# Altium PCB PCB.PcbDoc
Units mil, origin at the board's own origin, x right, y up, seen from the top; angles counter-clockwise.
Board outline 4527.56 x 4330.71 mil, 2 copper layers (Top Layer, Bottom Layer); 52 components, 53 nets, 229 pads, 4 vias.
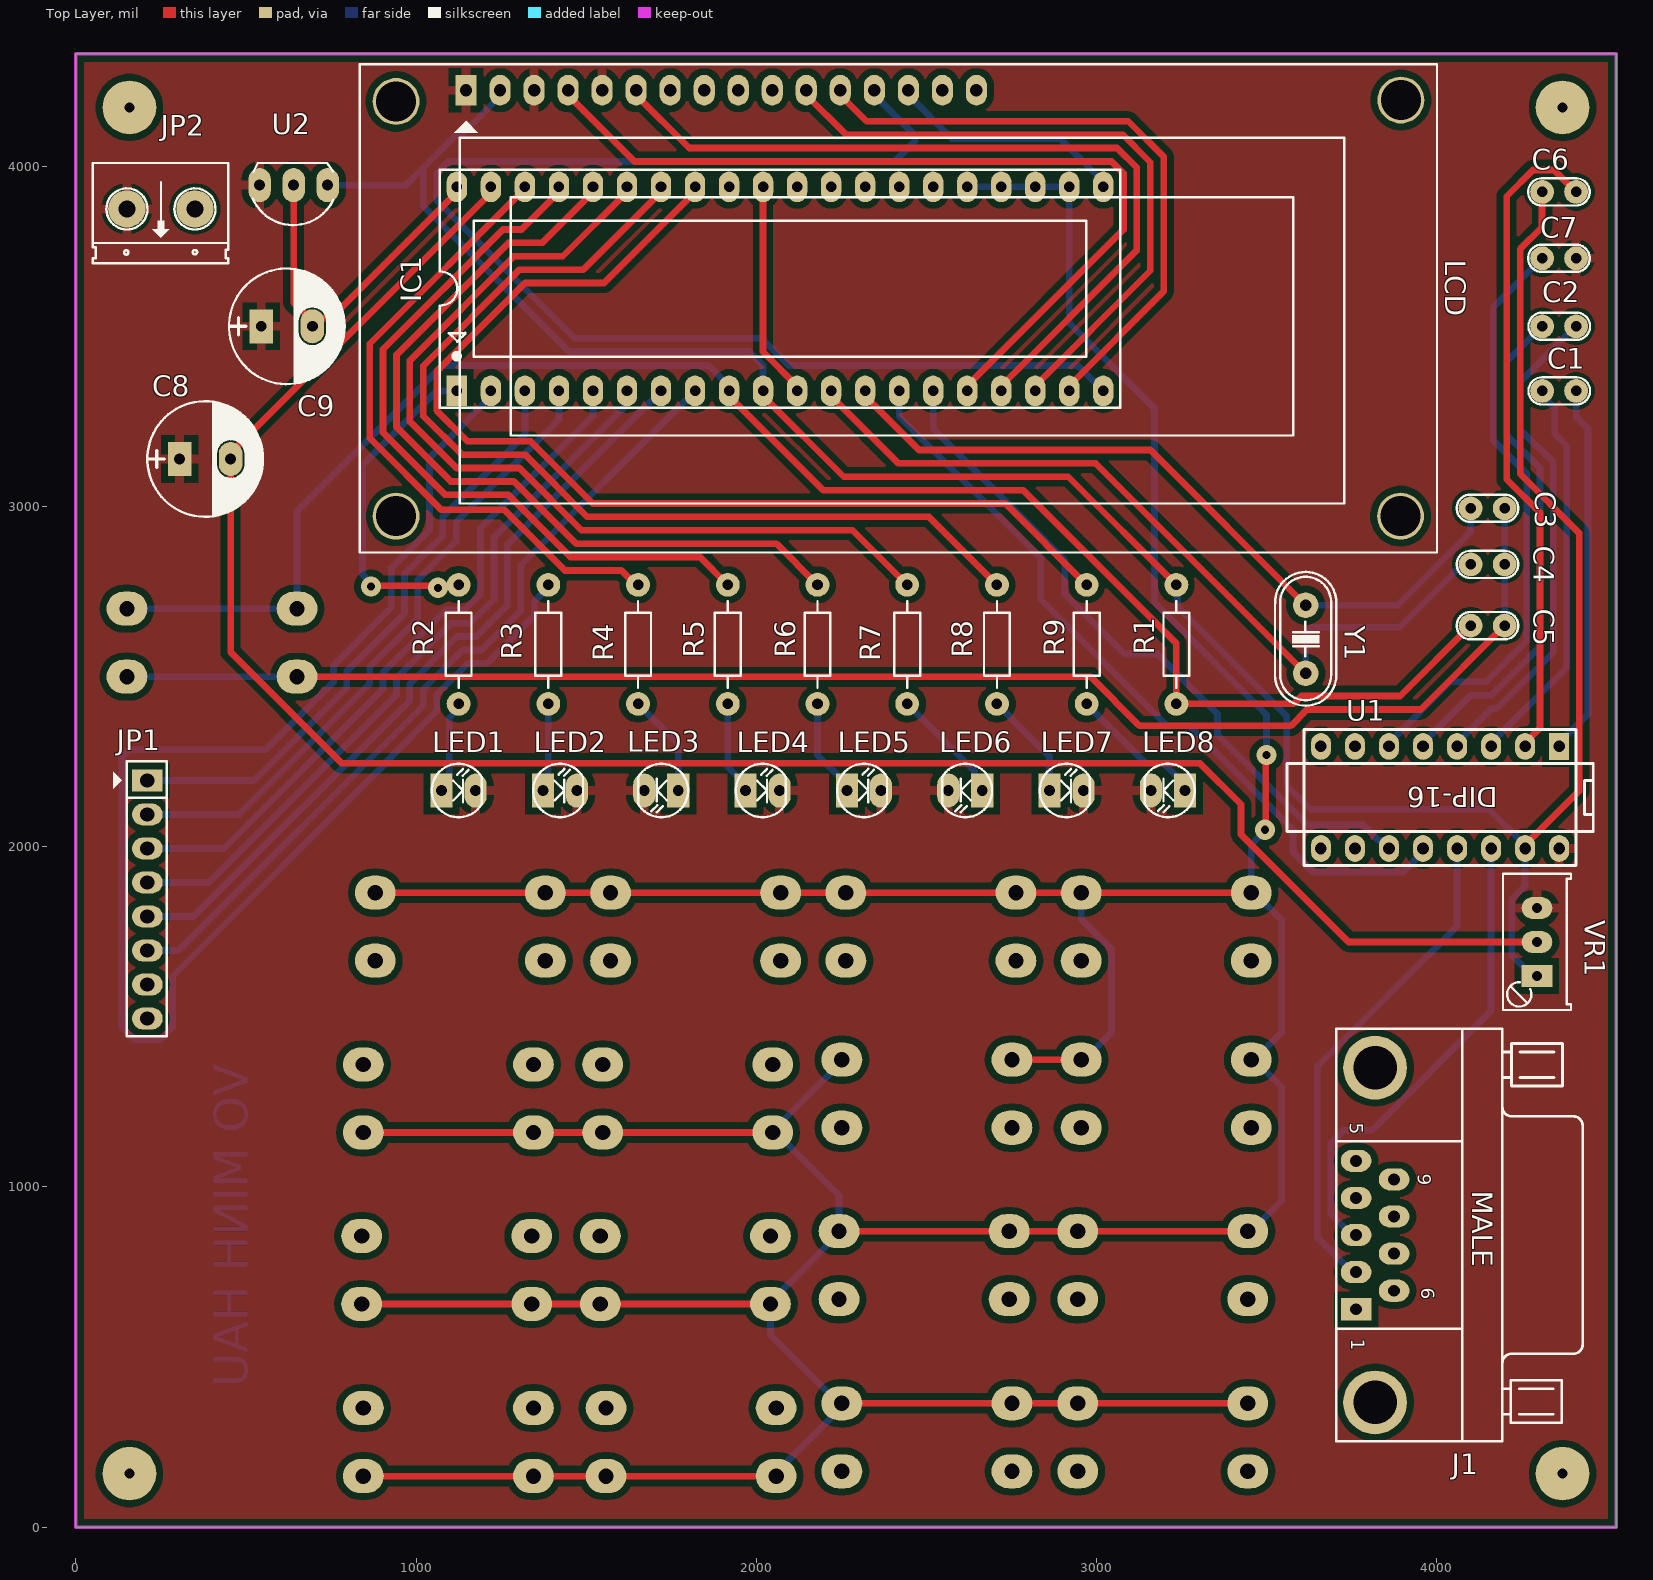
[diagram p0: Top Layer view]
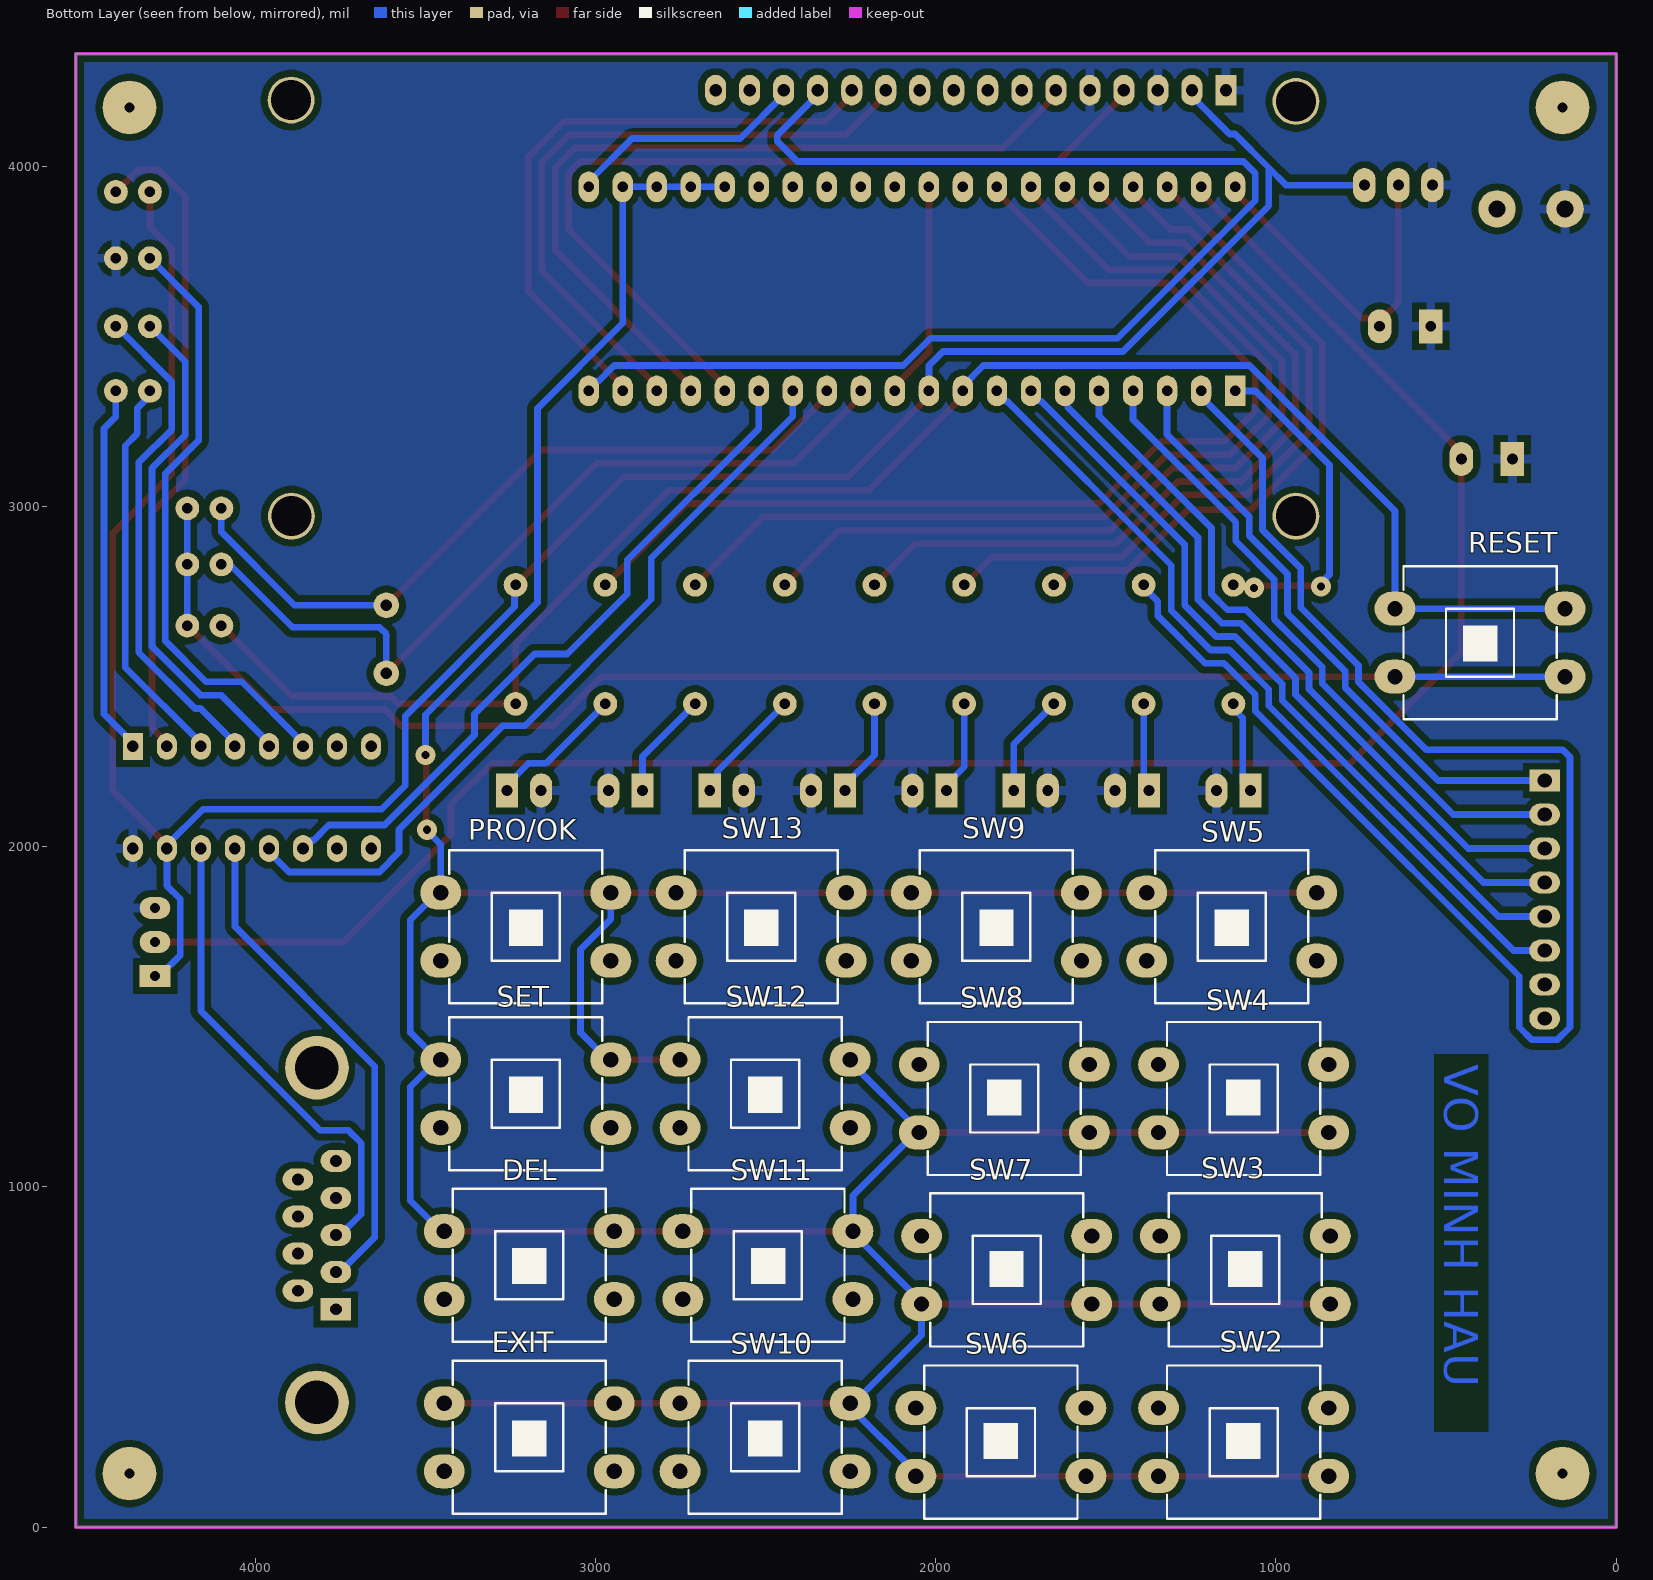
[diagram p1: Bottom Layer view, seen from below]
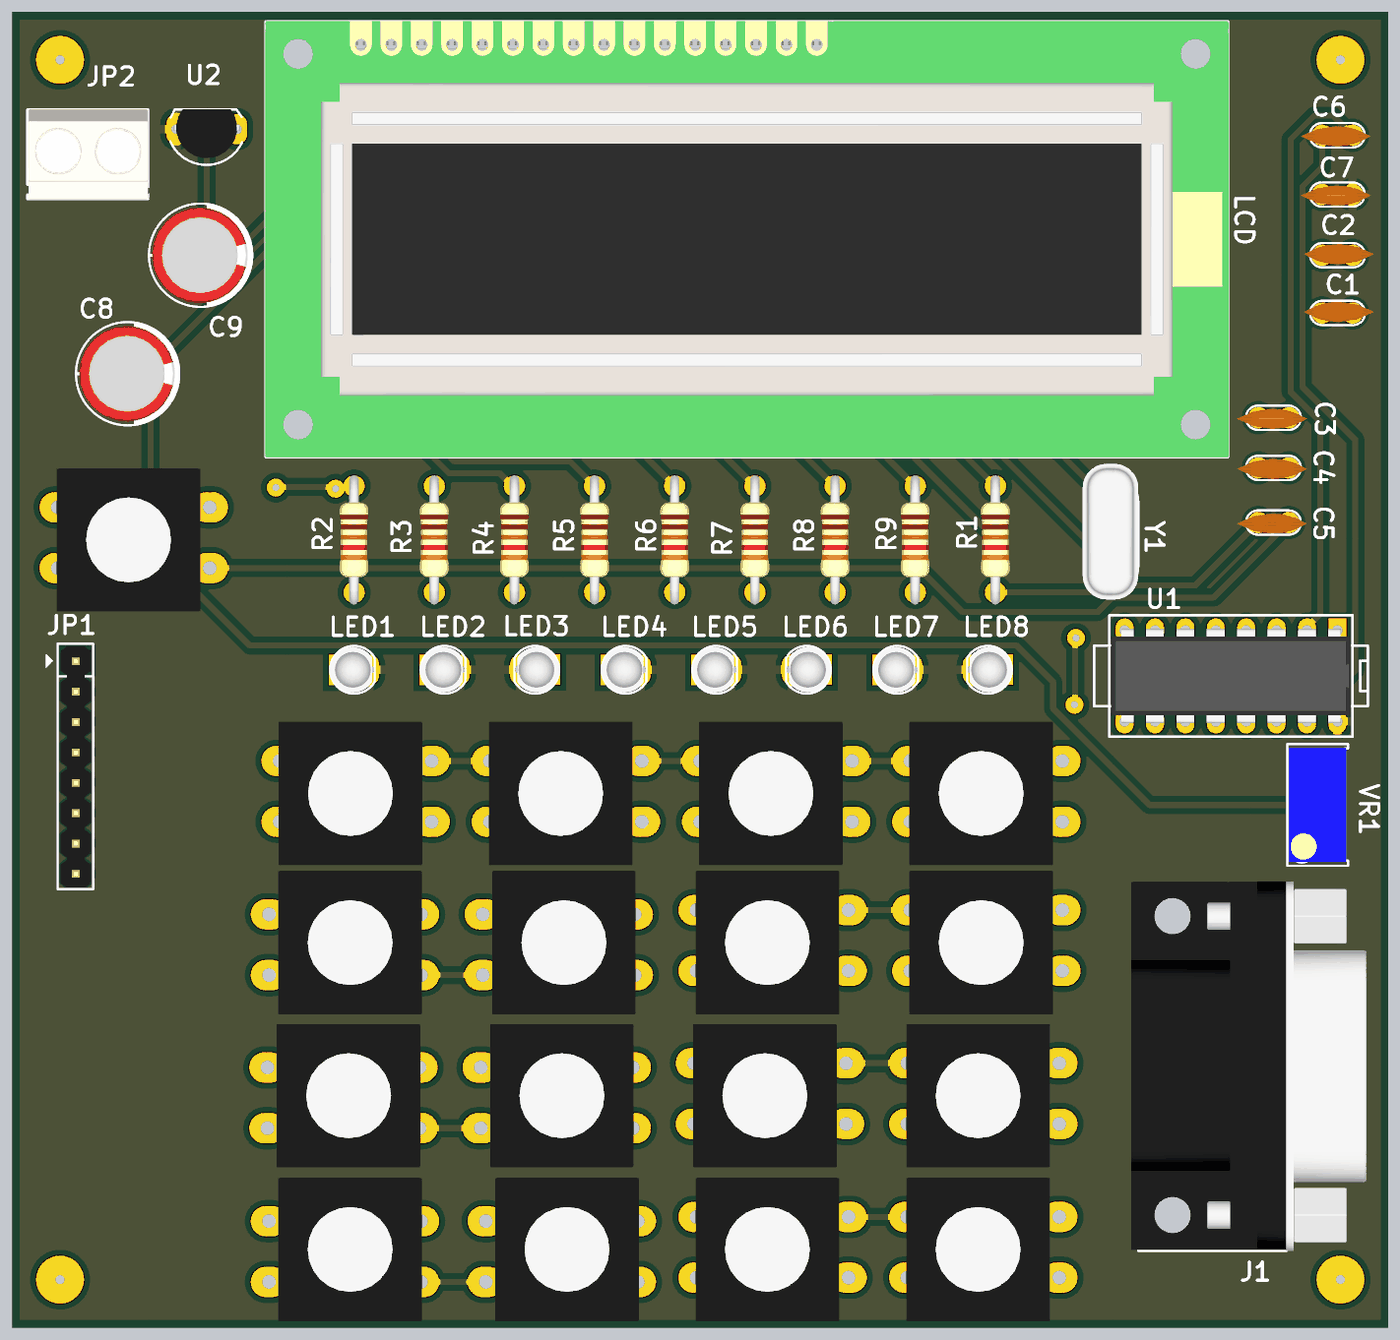
[diagram p2: 3D render of the assembled board from above, using the file's embedded part models]
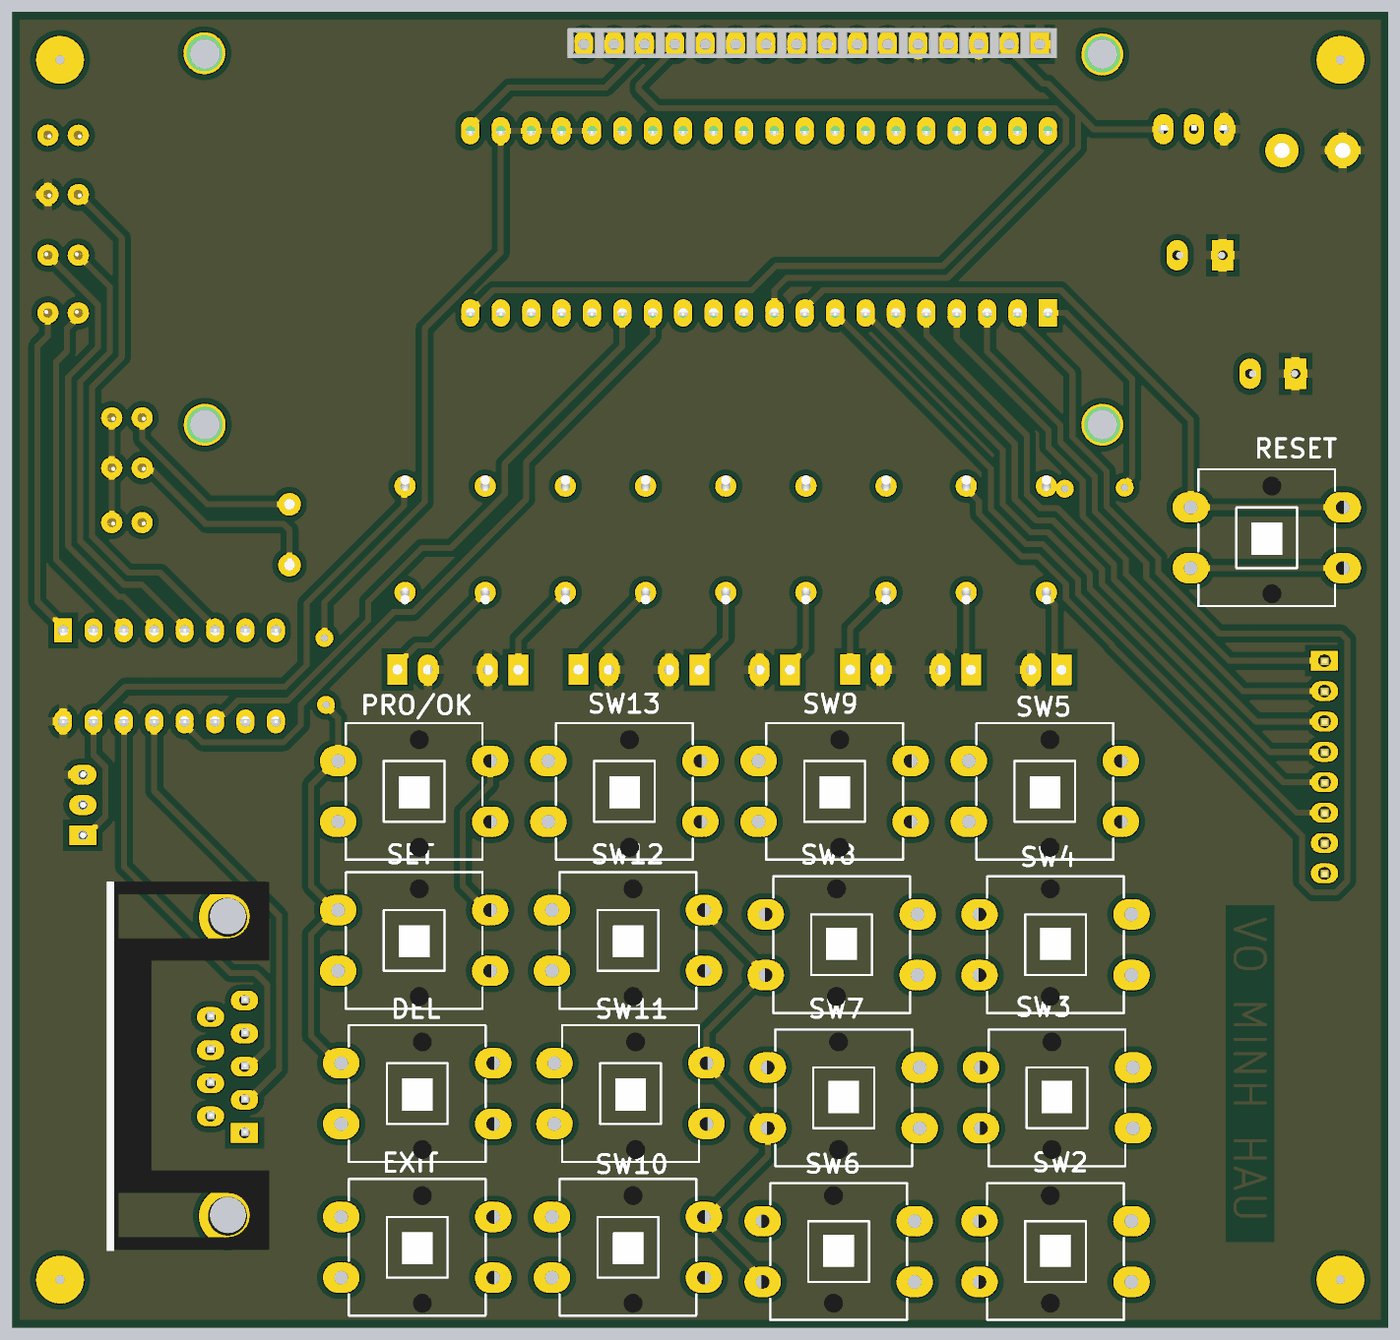
[diagram p3: 3D render of the assembled board from below, using the file's embedded part models]

## Layer stack, top to bottom
Top Solder: solder mask 0.4, Solder Resist, Dk 3.5
Top Layer: signal copper 1.4
Dielectric 1: dielectric 12.6, FR-4, Dk 4.8
Bottom Layer: signal copper 1.4
Bottom Solder: solder mask 0.4, Solder Resist, Dk 3.5

## Board outline
0,0 0,4330.71 4527.56,4330.71 4527.56,0

## Design rules (kind name [scope] priority, off if disabled: settings)
Clearance [All] p1: gap=19.68 ignorepadtopadclearanceinfootprint=FALSE
PolygonConnect [All] p1: connectstyle=Relief reliefconductorwidth=27.56 reliefentries=4 polygonreliefangle="90 Angle" airgapwidth=19.68
RoutingVias [All] p1: holewidth=23.62 width=59.06 viastyle="Through Hole" minholewidth=23.62 minwidth=59.06 maxholewidth=23.62 maxwidth=59.06
SolderMaskExpansion [All] p1: expansion=4 istentingtop=FALSE
Width [All] p1: maxlimit=39.37 minlimit=19.68 preferedwidth=27.56
30 further rules are at their usual default settings.

## Components (designator, comment, footprint, x,y, rotation, side; value= is the part's Value field where it differs from the comment)
C1 "100n" CN1 4310,3340 r0 top value=100pF
C2 "100n" CN1 4310,3530 r0 top value=100pF
C3 "27p" CN1 4200,2995 r180 top value=100pF
C4 "27p" CN1 4200,2830 r180 top value=100pF
C5 "0.1M" CN1 4200,2650 r180 top value=100pF
C6 "100n" CN1 4410,3925 r180 top value=100pF
C7 "100n" CN1 4410,3730 r180 top value=100pF
C8 "10M" CP1.5/3.4 305,3140 r0 top value=1000uF/16V
C9 "1M" CP1.5/3.4 545,3530 r0 top value=1000uF/16V
DEL "SW" SW4B 2945,870 r0 bottom value="Button chip 4 pin"
EXIT "SW" SW4B 2945,364.01 r0 bottom value="Button chip 4 pin"
IC1 "ATMEL 16L" DIP40/W0.6 2095,3640 r0 top value="Atmega 16L"
J1 "COM 9 MALE" "DSB 9-M" 3819.09,858.58 r90 top value="COM 9"
JP1 "JP8 PIN" JP8 210,2195 r270 top value=JP7
JP2 "Header2" Header2 350,3875 r180 top
LCD "LCD16x2" LCD16X2 1147,4224 r0 top
LED1 "LED" LED-3 1075,2165 r0 top value="LED 3 ly Single Colour"
LED2 "LED" LED-3 1372.86,2165 r0 top value="LED 3 ly Single Colour"
LED3 "LED" LED-3 1770.71,2165.7 r180 top value="LED 3 ly Single Colour"
LED4 "LED" LED-3 1968.57,2165 r0 top value="LED 3 ly Single Colour"
LED5 "LED" LED-3 2266.43,2165 r0 top value="LED 3 ly Single Colour"
LED6 "LED" LED-3 2664.29,2165.7 r180 top value="LED 3 ly Single Colour"
LED7 "LED" LED-3 2862.14,2165 r0 top value="LED 3 ly Single Colour"
LED8 "LED" LED-3 3260,2165.7 r180 top value="LED 3 ly Single Colour"
PRO/OK "SW" SW4B 2955,1865 r0 bottom value="Button chip 4 pin"
R1 "10k" R1/4W 3235,2420 r90 top value="R1/4W - 1K"
R2 "330" R1/4W 1125,2420 r90 top value="R1/4W - 1K"
R3 "330" R1/4W 1388.75,2420 r90 top value="R1/4W - 1K"
R4 "330" R1/4W 1652.5,2420 r90 top value="R1/4W - 1K"
R5 "330" R1/4W 1916.25,2420 r90 top value="R1/4W - 1K"
R6 "330" R1/4W 2180,2420 r90 top value="R1/4W - 1K"
R7 "330" R1/4W 2443.75,2420 r90 top value="R1/4W - 1K"
R8 "330" R1/4W 2707.5,2420 r90 top value="R1/4W - 1K"
R9 "330" R1/4W 2971.25,2420 r90 top value="R1/4W - 1K"
RESET "SW" SW4B 150,2700 r0 bottom value="Button chip 4 pin"
SET "SW" SW4B 2955,1374.01 r0 bottom value="Button chip 4 pin"
SW2 "SW" SW4B 1345,150 r180 bottom value="Button chip 4 pin"
SW3 "SW" SW4B 1340,655.99 r180 bottom value="Button chip 4 pin"
SW4 "SW" SW4B 1345,1160 r180 bottom value="Button chip 4 pin"
SW5 "SW" SW4B 880,1865 r0 bottom value="Button chip 4 pin"
SW6 "SW" SW4B 2058.33,150 r180 bottom value="Button chip 4 pin"
SW7 "SW" SW4B 2041.67,655.99 r180 bottom value="Button chip 4 pin"
SW8 "SW" SW4B 2048.33,1160 r180 bottom value="Button chip 4 pin"
SW9 "SW" SW4B 1571.67,1865 r0 bottom value="Button chip 4 pin"
SW10 "SW" SW4B 2251.67,364.01 r0 bottom value="Button chip 4 pin"
SW11 "SW" SW4B 2243.33,870 r0 bottom value="Button chip 4 pin"
SW12 "SW" SW4B 2251.67,1374.01 r0 bottom value="Button chip 4 pin"
SW13 "SW" SW4B 2263.33,1865 r0 bottom value="Button chip 4 pin"
U1 "MAX3232" DIP16 4009.71,2144.92 r180 top
U2 "LM35" QTO-92 640,3945 r180 top
VR1 "10K" VR1 4295,1620 r90 top value="VR 10K"
Y1 "16Mhz" XT2 3615,2610 r270 top value=4Mhz

## Footprints (in the part's own frame and the unit in brackets; to place one, negate y for a bottom-side part, rotate by r counter-clockwise, add the part's x,y. Pads: shape width x height; smd on the part's side, far side on the other; paste and mask are expansions set on the pad)
CN1 [mil]
  round 70 hole 31: 1(0,0) 2(100,0)
  silkscreen extent -40,-40 141,40, body extent -60,-30 170,37, height 265
CP1.5/3.4 [mil] "Tu hoa 220->470uF,16V, 470uF/16V,25V"
  rect 70x100 hole 32: 1(0,0)
  oval 70x100 hole 32: 2(150,0)
  silkscreen extent -95,-170 245,170, body extent -85,-157 230,157, height 446
DIP16 [mm]
  rect 1.5x2 hole 0.864: 1(-8.897,-3.812)
  oval 1.5x2 hole 0.864: 2(-6.357,-3.812) 3(-3.817,-3.812) 4(-1.277,-3.812) 5(1.263,-3.812) 6(3.803,-3.812) 7(6.343,-3.812) 8(8.883,-3.812) 9(8.883,3.808) 10(6.343,3.808) 11(3.803,3.808) 12(1.263,3.808) 13(-1.277,3.808) 14(-3.817,3.808) 15(-6.357,3.808) 16(-8.897,3.808)
  silkscreen extent -11.44,-5.08 11.42,5.08, body extent -10,-3.93 10,3.94, height 1.99
DIP40/W0.6 [mil] "40 PIN, W 600mil, Pin to pin 100mil"
  rect 60x90 hole 31: 1(-975,-300)
  oval 60x90 hole 31: 2(-875,-300) 3(-775,-300) 4(-675,-300) 5(-575,-300) 6(-475,-300) 7(-375,-300) 8(-275,-300) 9(-175,-300) 10(-75,-300) 11(25,-300) 12(125,-300) 13(225,-300) 14(325,-300) 15(425,-300) 16(525,-300) 17(625,-300) 18(725,-300) 19(825,-300) 20(925,-300) 21(925,300) 22(825,300) 23(725,300) 24(625,300) 25(525,300) 26(425,300) 27(325,300) 28(225,300) 29(125,300) 30(25,300) 31(-75,300) 32(-175,300) 33(-275,300) 34(-375,300) 35(-475,300) 36(-575,300) 37(-675,300) 38(-775,300) 39(-875,300) 40(-975,300)
  silkscreen extent -1025,-350 975,350, body extent -1057,-310 1007,300, height 224
"DSB 9-M" [mil] "COM MALE D Subminiature; 9 Position; Right Angle; Pitch 1.385 mm"
  rect 65x90 hole 35: 1(-218.11,55.91)
  oval 65x90 hole 35: 2(-109.05,55.91) 3(0,55.91) 4(109.06,55.91) 5(218.11,55.91) 6(-163.58,-55.91) 7(-54.53,-55.91) 8(54.53,-55.91) 9(163.58,-55.91)
  round 187.4 hole 128.35: 10(491.93,0) 11(-491.93,0)
  silkscreen extent -606,-610 606,114, body extent -606,-638 610,138, height 473
Header2 [mil] "Header 2, 2 pin, hight 300mil, Pin to Pin 200, Colour Green"
  round 110 hole 50: 1(0,0) 2(200,0)
  silkscreen extent -98,-135 300,160, body extent -97,-135 297,160, height 394
JP8 [mil] "JP8"
  rect 65x90 hole 42: 1(0,0)
  oval 65x90 hole 42: 2(100,0) 3(200,0) 4(300,0) 5(400,0) 6(500,0) 7(600,0) 8(700,0)
  silkscreen extent -56,-100 752,57, body extent -48,-50 748,48, height 323
LCD16X2 [mil] "LCD dipslay 16x2, 16 pin"
  rect 62x90 hole 36: 1(0,0)
  oval 62x90 hole 36: 2(100,0) 3(200,0) 4(300,0) 5(400,0) 6(500,0) 7(600,0) 8(700,0) 9(800,0) 10(900,0) 11(1000,0) 12(1100,0) 13(1200,0) 14(1300,0) 15(1400,0) 16(1500,0)
  round 137.8 hole 118.11: "Hole 0"(-206,-1252) "Hole 0"(-206,-33) "Hole 0"(2747,-1252) "Hole 0"(2748,-29)
  silkscreen extent -313,-1359 2854,76, body extent -315,-1360 2855,77, height 729
LED-3 [mil] "LED 2 PIN, 3ly Only colour"
  rect 65x100 hole 32: 1(0,0)
  oval 65x100 hole 32: 2(100,0)
  silkscreen extent -29,-78 118,79, body extent -29,-75 109,75, height 256
QTO-92 [mil] "TO-92"
  oval 66x100 hole 32: 1(-100,0) 2(0,0) 3(100,0)
  silkscreen extent -117,-65 120,118, body extent -109,-66 109,95, height 245
R1/4W [mil] "R 1/4W, 2 Pin, 350mil"
  round 70 hole 31: 1(0,0) 2(350,0)
  silkscreen extent 48,-38 302,38, body extent -40,-47 386,47, height 111
SW4B [mil] "SW button 4pin, 450 x 450 mil"
  oval 120x100 hole 45: 1(0,200) 2(500,0) 3(500,200) 4(0,0)
  silkscreen extent 25,-125 475,325, body extent -3,-129 469,343, height 169
VR1 [mil] "Variable Resistor"
  rect 65x90 hole 30: 1(0,0)
  oval 65x90 hole 30: 2(100,0) 3(200,0)
  silkscreen extent -100,-100 301,100, body extent -87,-94 289,96, height 455
XT2 [mil] "Footpin for Crystal 2 pin"
  round 75 hole 34: 1(-100,0) 2(100,0)
  silkscreen extent -198,-90 195,90, body extent -233,-93 213,90, height 138

## Part data
C1 C2 C3 C4 C5 C6 C7: library part CN1, "Cap np  1pF - 472pF"
C8 C9: library part CP4, "Cap 1000uF/16V - 220uF/50V", Description 1="2200uF-3300uF/6,3V - 1000uF-2200uF/10V", Description 2="1000uF/16V - 470uF => 1000uF/25V - 100uF/100V", Description 3=330uF>470uF/35V_220uF>470uF/50V_10uF>22uF/250V, Description 4="220uF => 330uF/63V - 10uF =>33uF/160 - 200V", Description 5="4,7uF>10uF/250V_3,3uF>10uF/400V - 2,2uF>4,7uF/450V"
DEL EXIT PRO/OK RESET SET SW2 SW3 SW4 SW5 SW6 SW7 SW8 SW9 SW10 SW11 SW12 SW13: library part SW4, "Switch button 4 pin"
IC1: library part Atmega16L, "8-Bit AVR Microcontroller with 16K Bytes of In-System Programmable Flash Memory"
J1: library part DSB9M, "COM 9", PackageDocument=O, DatasheetDocument=1-Sep-1999, Gender=Receptacle, LatestRevisionDate=17-Jul-2002, LatestRevisionNote="Re-released for DXP Platform.", Orientation="Right Angle", PackageReference=788750, Positions=9, Published=15-Jun-2001, Publisher="Altium Limited"
JP1: library part JP8
JP2: "Header IDC, 2 x 1 Pin Vertical 2.54mm Pitch (Non-Boxed, Male)", Manufacturer="W¨¹rth Elektronik eiSos GmbH", partNo=613002143121, ComponentLink1 Description=Manufacturer, ComponentLink1URL=http://www.we-online.com, ComponentLink2 Description=Datasheet, ComponentLink2URL=http://katalog.we-online.de/em/datasheet/6130xx143121.pdf, Created by="Karrer Zheng", Created Date="29 March 2013", NoPins=02
LCD: library part "LCD Text"
LED1 LED2 LED3 LED4 LED5 LED6 LED7 LED8: "LED Single colour Green and Red"
R1 R2 R3 R4 R5 R6 R7 R8 R9: library part R1/4W, "Resistor 1/4W"
U1: Manufacturer="Texas Instruments", Manufacturer Part Number=MAX232DR, Package / Case="16-SOIC (3.9mm Width)", Supplier Part Number=296-14619-1-ND, Voltage - Supply="4.5 V ~ 5.5 V", Category="Integrated Circuits (ICs)", Number of Drivers/Receivers=2/2, Packaging="Cut Tape (CT)", Protocol=RS232, RoHS="RoHS Compliant", Supplier=Digi-Key, Supplier 1=Digi-Key, Supplier Part Number 1=296-14619-1-ND, Type=Transceiver
U2: "Teminal"
VR1: library part VR1, "Var Resistor"
Y1: library part XT2, "Crystal For all Crystal 2pin."

## Free pads (board coordinates)
  round 157.48 hole 30: 4(157.48,157.48) 4(4370.08,157.48) 8(4370.08,4173.23) 9(157.48,4173.23)

## Via types
v1: diameter 59.06, hole 23.62, Top Layer to Bottom Layer, 4 vias

## Nets (pads, with @x,y where several pads share a name; then routed paths per layer and width w, separated by ;. In a path a pad name is that pad's centre, name@x,y a point inside that pad or via, vN(x,y) a via of type N, cw(c..) or ccw(c..) an arc to the next point about the centre after c; other vN are vias at no path point)
1: IC1.1 R2.2 | length 999.8
  Top Layer w19.68: v1(867.52,2765) 870.02,2767.5 1058.17,2767.5 v1(1064.37,2761.3)
  Bottom Layer w19.68: v1(867.52,2765) 867.52,2775.65 842.57,2800.6 842.57,3122.1 1060.47,3340 IC1.1 ; v1(1064.37,2761.3) 1068.72,2765.65 1120.65,2765.65 R2.2
2: IC1.2 R3.2 | length 4524.4
  Bottom Layer w19.68: IC1.2 1220,3323.24 1039.43,3142.67 1039.43,2931.23 926.57,2818.38 926.57,2702.57 757.02,2533.02 757.02,2484.55 557.47,2285 156.53,2285 135.47,2263.94 135.47,1469.31 171.81,1432.97 248.19,1432.97 284.53,1469.31 284.53,1619.53 909.53,2244.53 909.53,2247.32 1060.47,2398.26 1060.47,2446.73 1153.07,2539.32 1208.29,2539.32 1347.01,2678.04 1347.01,2720.49 1388.75,2762.23 R3.2
5V: JP2.1
9: C5.2 IC1.9 R1.1 RESET.2 RESET.4 | length 5042.7
  Top Layer w19.68: IC1.9 1920,3325 2196.54,3048.46 2784.05,3048.46 3235,2597.51 R1.1 3580.29,2420 3603.26,2442.97 3892.97,2442.97 C5.2
  Bottom Layer w19.68: RESET.4 RESET.2 650,2986.76 1077.77,3414.53 1860.47,3414.53 1920,3355 IC1.9
11: IC1.11 IC1.31 | length 641.4
  Top Layer w19.68: IC1.31 2020,3455 2120,3355 IC1.11
12: C4.2 IC1.12 Y1.2 | length 2432.5
  Top Layer w19.68: IC1.12 2220,3325 2417.8,3127.2 2997.8,3127.2 Y1.2
  Bottom Layer w19.68: Y1.2 3615,2625 3635,2645 3890,2645 4065.37,2820.37 4090.37,2820.37 C4.2
13: C3.2 IC1.13 Y1.1 | length 2208.8
  Top Layer w19.68: IC1.13 2320,3325 2478.43,3166.57 3158.43,3166.57 Y1.1
  Bottom Layer w19.68: Y1.1 3885,2710 4100,2925 C3.2
14: IC1.14 U1.12 | length 2314.1
  Bottom Layer w19.68: IC1.14 2420,3265.47 2836.22,2849.25 2836.22,2727.52 3208.27,2355.47 3273.04,2355.47 3577.5,2051.02 3577.5,1984.14 3635.54,1926.1 3900.94,1926.1 3960,1985.16 U1.12
15: IC1.15 U1.11 | length 2056.5
  Bottom Layer w19.68: IC1.15 2520,3230 2906.72,2843.28 2906.72,2743.27 3083.29,2566.7 3179.56,2566.7 3356.13,2390.13 3356.13,2328.07 3620.3,2063.9 3784.46,2063.9 3829.69,2018.67 3835.52,2018.67 3859.19,1995 U1.11
16: IC1.16 LCD.4 | length 2600.9
  Top Layer w19.68: LCD.4 1447,4210 1642.47,4014.53 3044.66,4014.53 3079.53,3979.66 3079.53,3814.53 2620,3355 IC1.16
  Bottom Layer w19.68: LCD.4@1447,4210 LCD.4 ; IC1.16 IC1.16@2620,3355
17: IC1.17 LCD.6 | length 2424.7
  Top Layer w19.68: LCD.6 1647,4210 1803.1,4053.9 3060.96,4053.9 3118.9,3995.96 3118.9,3753.9 2720,3355 IC1.17
  Bottom Layer w19.68: LCD.6@1647,4210 LCD.6 ; IC1.17 IC1.17@2720,3355
18: IC1.18 LCD.11 | length 1948.6
  Top Layer w19.68: LCD.11 2147,4210 2263.73,4093.27 3077.27,4093.27 3158.27,4012.27 3158.27,3693.27 2820,3355 IC1.18
  Bottom Layer w19.68: LCD.11@2147,4210 LCD.11 ; IC1.18 IC1.18@2820,3355
19: IC1.19 LCD.12 | length 1860.8
  Top Layer w19.68: LCD.12 2247,4210 2324.36,4132.64 3093.58,4132.64 3197.64,4028.58 3197.64,3632.64 2920,3355 IC1.19
  Bottom Layer w19.68: LCD.12@2247,4210 LCD.12 ; IC1.19 IC1.19@2922.41,3342.41
20: IC1.20 LCD.13 | length 3931.3
  Top Layer w19.68: LCD.13@2347,4210 LCD.13
  Bottom Layer w19.68: LCD.13 2347,4210 2466.22,4090.78 2466.22,4074.47 2406.27,4014.53 1095.34,4014.53 1060.47,3979.66 1060.47,3900.34 1465.82,3495 2015,3495 2095.47,3414.53 2944.66,3414.53 2948.94,3410.25 2949.75,3410.25 2990.09,3369.91 2994.18,3369.91 3020,3344.09 IC1.20
21: IC1.21 LCD.14 | length 736.6
  Top Layer w19.68: LCD.14@2447,4210 LCD.14 ; IC1.21 IC1.21@3020,3955
  Bottom Layer w19.68: LCD.14 2447,4210 2574.69,4082.31 2892.69,4082.31 3020,3955 IC1.21
22: DEL.2 DEL.4 EXIT.2 EXIT.4 IC1.22 IC1.23 IC1.24 IC1.25 PRO/OK.2 PRO/OK.4 SET.2 SET.4 SW2.2 SW2.4 SW3.2 SW3.4 SW4.2 SW4.4 SW5.2 SW5.4 SW6.2 SW6.4 SW7.2 SW7.4 SW8.2 SW8.4 SW9.2 SW9.4 SW10.2 SW10.4 SW11.2 SW11.4 SW12.2 SW12.4 SW13.2 SW13.4 | length 14833.8
  Top Layer w19.68: SW3.2 SW3.4 SW7.2 SW7.4 ; SW2.2 SW2.4 SW6.2 SW6.4 ; SW4.2 SW4.4 SW8.2 SW8.4 ; SW5.4 SW5.2 SW9.4 SW9.2 SW13.4 SW13.2 PRO/OK.4 PRO/OK.2 PRO/OK.2@3465,1865 ; SW11.4 SW11.2 DEL.4 DEL.2 ; SW10.4 SW10.2 EXIT.4 EXIT.2 ; SW12.2 SET.4 ; IC1.22@2920,3925 IC1.22 ; v1(3495,2050) 3497.5,2052.5 3497.5,2267.5 v1(3500,2270)
  Bottom Layer w19.68: SW6.4 2058.33,160.34 2251.67,353.67 SW10.4 2241.67,364.01 2041.67,564.01 SW7.4 2041.67,662.16 2243.33,863.83 SW11.4 2243.33,975 2058.33,1160 SW8.4 2048.33,1165.34 2251.67,1368.67 SW12.4 ; IC1.25 IC1.24 IC1.23 IC1.22 2920,3539.18 3170.47,3288.71 3170.47,2717.71 3500,2388.18 v1(3500,2270) ; SET.4 2965,1374.01 3044.53,1453.53 3044.53,1697.94 2955,1787.47 PRO/OK.4 ; DEL.2 3455,870 3544.53,959.53 3544.53,1294.48 SET.2@3465,1374.01 ; SET.2 SET.2@3465,1374.01 ; v1(3495,2050) 3495,2046.48 3455,2006.48 PRO/OK.2 3465,1865 3544.53,1785.47 3544.53,1453.53 SET.2@3465,1374.01
26: IC1.26
27: IC1.27
28: IC1.28
29: IC1.29
30-32: C6.2 IC1.10 LCD.2 R1.2 U1.15 U2.1 VR1.1 | length 7503.9
  Top Layer w19.68: IC1.10 2020,3325 2257.17,3087.83 2917.17,3087.83 R1.2 ; U1.15 4260,2004.84 4419.06,2163.9 4419.06,2922.88 4245.47,3096.46 4245.47,3756.73 4310,3821.26 C6.2
  Bottom Layer w19.68: U2.1 970.14,3945 1021.1,3995.96 ; LCD.2 1247,4206.24 1135.89,4095.13 1120.27,4095.13 1021.1,3995.96 ; IC1.10 2020,3414.53 1978.9,3455.63 1449.51,3455.63 1021.1,3884.04 1021.1,3924.67 1021.1,3995.96 ; R1.2 3238.39,2766.61 3238.39,2705.47 3559.06,2384.81 3559.06,2180.82 3629.87,2110 4154.84,2110 4260,2004.84 U1.15 4260,1885.22 4220.47,1845.69 4220.47,1682.03 4282.5,1620 VR1.1
33: IC1.33 R9.2 | length 3230.8
  Top Layer w19.68: IC1.33 1820,3925 1552.26,3657.26 1320.5,3657.26 1060.47,3397.23 1060.47,3282.77 1151.19,3192.05 1336.34,3192.05 1519.31,3009.09 2732.16,3009.09 R9.2
34: IC1.34 R8.2 | length 2964.9
  Top Layer w19.68: IC1.34 1720,3925 1491.63,3696.63 1304.19,3696.63 1021.1,3413.54 1021.1,3266.46 1134.88,3152.68 1320.03,3152.68 1503,2969.72 2507.78,2969.72 R8.2
35: IC1.35 R7.2 | length 2699
  Top Layer w19.68: IC1.35 1620,3925 1431,3736 1287.89,3736 981.73,3429.85 981.73,3250.15 1118.57,3113.31 1303.72,3113.31 1486.69,2930.35 2283.4,2930.35 R7.2
36: IC1.36 R6.2 | length 2433.1
  Top Layer w19.68: IC1.36 1520,3925 1370.37,3775.37 1271.58,3775.37 942.36,3446.15 942.36,3233.85 1102.27,3073.94 1287.42,3073.94 1470.38,2890.98 2059.02,2890.98 R6.2
37: IC1.37 R5.2 | length 2167.2
  Top Layer w19.68: IC1.37 1420,3925 1309.74,3814.74 1255.27,3814.74 902.99,3462.46 902.99,3217.54 1085.96,3034.57 1271.11,3034.57 1454.08,2851.61 1834.64,2851.61 R5.2
38: IC1.38 R4.2 | length 1895.3
  Top Layer w19.68: IC1.38 1320,3935.15 863.62,3478.77 863.62,3201.23 1074.43,2990.43 1259.58,2990.43 1437.77,2812.24 1603.48,2812.24 1645.72,2770 R4.2
39: C8.2 IC1.39 VR1.2 | length 5929.3
  Top Layer w19.68: IC1.39 1220,3922.5 455,3157.5 C8.2 455,2572.53 782.31,2245.22 3304.73,2245.22 3425,2124.96 3425,2036.48 3741.48,1720 VR1.2
40: C9.2 IC1.40 U2.2 | length 1040.8
  Top Layer w19.68: U2.2 640,3600 695,3545 C9.2@695,3531.38 ; C9.2 C9.2@695,3531.38 ; IC1.40 1120,3925 749.63,3554.63 718.24,3554.63 C9.2@695,3531.38
GND: C7.1 C8.1 C9.1 JP2.2 LCD.1 LCD.3 LCD.5 LED1.2 LED2.2 LED3.2 LED4.2 LED5.2 LED6.2 LED7.2 LED8.2 U1.16 U2.3 VR1.3
JP2-1: IC1.3 JP1.1 | length 1788.2
  Bottom Layer w19.68: JP1.1 523.15,2195 796.39,2468.25 796.39,2516.71 965.94,2686.27 965.94,2802.07 1078.8,2914.92 1078.8,2970.6 1320,3211.81 IC1.3
JP2-2: IC1.4 JP1.2 | length 1903.7
  Bottom Layer w19.68: JP1.2 478.82,2095 863.62,2479.8 863.62,2528.27 1005.31,2669.96 1005.31,2785.77 1118.17,2898.62 1118.17,2954.29 1420,3256.13 IC1.4
JP2-3: IC1.5 JP1.3 | length 2051.5
  Bottom Layer w19.68: JP1.3 434.5,1995 902.99,2463.49 902.99,2511.96 1087.84,2696.8 1143.06,2696.8 1189.53,2743.27 1189.53,2936.51 1520,3266.98 IC1.5
JP2-4: IC1.6 JP1.4 | length 2166.9
  Bottom Layer w19.68: JP1.4 390.18,1895 942.36,2447.18 942.36,2495.65 1104.14,2657.43 1159.37,2657.43 1228.9,2726.96 1228.9,2908.9 1612.29,3292.29 1612.29,3332.29 IC1.6
JP2-5: IC1.7 JP1.5 | length 2284.8
  Bottom Layer w19.68: JP1.5 345.86,1795 981.73,2430.88 981.73,2479.34 1120.45,2618.06 1175.67,2618.06 1268.27,2710.66 1268.27,2888.27 1690.09,3310.09 1694.18,3310.09 1720,3335.91 IC1.7
JP2-6: IC1.8 JP1.6 | length 2400
  Bottom Layer w19.68: JP1.6@210.24,1695 301.53,1695 1021.1,2414.57 1021.1,2463.04 1136.76,2578.69 1191.98,2578.69 1307.64,2694.35 1307.64,2827.64 1790.09,3310.09 1794.18,3310.09 1820,3335.91 IC1.8
NetC1_1: C1.1 U1.3 | length 1167.3
  Bottom Layer w19.68: U1.3 4160,2304.84 4382.64,2527.48 4382.64,3178.75 4347.64,3213.75 4347.64,3288.75 4310,3326.38 C1.1
NetC1_2: C1.2 U1.1 | length 1094.7
  Bottom Layer w19.68: U1.1 4360,2304.84 4445,2389.84 4445,3230 4410,3265 C1.2
NetC2_1: C2.1 U1.5 | length 1496.4
  Bottom Layer w19.68: U1.5 3960,2304.84 4100.79,2445.63 4161.31,2445.63 4303.9,2588.22 4303.9,3113.04 4206.1,3210.83 4206.1,3426.1 C2.1
NetC2_2: C2.2 U1.4 | length 1471.2
  Bottom Layer w19.68: U1.4 4060,2304.84 4161.42,2406.26 4177.61,2406.26 4343.27,2571.91 4343.27,3129.34 4245.47,3227.14 4245.47,3366.73 4408.74,3530 C2.2
NetC3_1: C3.1 C4.1 C5.1 RESET.1 RESET.3 | length 4576.9
  Top Layer w19.68: RESET.3 2982.51,2500 3127.03,2355.47 3571.44,2355.47 3619.23,2403.27 3953.27,2403.27 C5.1
  Bottom Layer w19.68: RESET.1 RESET.3 ; C5.1 C4.1 C3.1
NetC6_1: C6.1 U1.2 | length 1938.6
  Top Layer w19.68: U1.2 4260,2304.84 4303.9,2348.74 4303.9,2982.36 4206.1,3080.15 4206.1,3912.36 4283.27,3989.53 4345.47,3989.53 C6.1
NetC7_2: C7.2 U1.6 | length 1763.8
  Bottom Layer w19.68: U1.6 3860,2304.84 4040.16,2485 4145,2485 4264.53,2604.53 4264.53,3096.73 4166.73,3194.52 4166.73,3586.73 C7.2
NetJ1_2: J1.2 U1.13 | length 1470.1
  Bottom Layer w19.68: J1.2 3750.69,749.53 3649.29,850.93 3649.29,1354.98 4060,1765.69 U1.13
NetJ1_3: J1.3 U1.14 | length 1418.4
  Bottom Layer w19.68: J1.3 3750.69,858.58 3688.66,920.61 3688.66,1128.66 3726.46,1166.46 3809.31,1166.46 4160,1517.15 U1.14
NetLED1_1: LED1.1 R2.1 | length 275.7
  Bottom Layer w19.68: LED1.1 1097.66,2187.66 1097.66,2379.04 1125,2406.38 R2.1
NetLED2_1: LED2.1 R3.1 | length 261.6
  Bottom Layer w19.68: LED2.1 1388.75,2180.89 R3.1
NetLED3_1: LED3.1 R4.1 | length 303.3
  Bottom Layer w19.68: R4.1 1770.71,2301.79 LED3.1
NetLED4_1: LED4.1 R5.1 | length 276.7
  Bottom Layer w19.68: R5.1 1916.25,2234.82 1968.57,2182.5 LED4.1
NetLED5_1: LED5.1 R6.1 | length 290.8
  Bottom Layer w19.68: R6.1 2180,2268.93 2266.43,2182.5 LED5.1
NetLED6_1: LED6.1 R7.1 | length 345.7
  Bottom Layer w19.68: R7.1 2641.63,2222.12 2641.63,2188.36 LED6.1
NetLED7_1: LED7.1 R8.1 | length 319.1
  Bottom Layer w19.68: R8.1 2862.14,2265.36 LED7.1
NetLED8_1: LED8.1 R9.1 | length 404.3
  Bottom Layer w19.68: R9.1 3146.03,2245.22 3197.97,2245.22 3237.34,2205.86 3237.34,2188.36 LED8.1
pads on no net: "LCD.Hole 0" DEL.1 DEL.3 EXIT.1 EXIT.3 IC1.30 IC1.32 J1.1 J1.4 J1.5 J1.6 J1.7 J1.8 J1.9 J1.10 J1.11 JP1.7 JP1.8 LCD.7 LCD.8 LCD.9 LCD.10 LCD.15 LCD.16 PRO/OK.1 PRO/OK.3 SET.1 SET.3 SW2.1 SW2.3 SW3.1 SW3.3 SW4.1 SW4.3 SW5.1 SW5.3 SW6.1 SW6.3 SW7.1 SW7.3 SW8.1 SW8.3 SW9.1 SW9.3 SW10.1 SW10.3 SW11.1 SW11.3 SW12.1 SW12.3 SW13.1 SW13.3 U1.7 U1.8 U1.9 U1.10

## Polygon pours and split planes (outlines as drawn)
GND on Top Layer "GND_L01_P001" (solid, pour order 1): 0,0 0,4330 4525,4330 4525,0
GND on Bottom Layer "GND_L02_P002" (solid, pour order 2): 0,0 4526.56,0 4527.29,-0.73 4530,1.98 4530,4330 0,4330

## Keep-outs
Keep-Out Layer:
  the board outline again, w10

## Other copper
Bottom Layer:
  text "VO MINH HAU" at 505,1360 h100 r90

## Text inside footprints (layer, text, board x,y; h text height)
J1: Top Overlay "6" at 3954.09,703.58 h40 r270; Top Overlay "9" at 3944.09,1038.58 h40 r270; Top Overlay "5" at 3744.09,1188.58 h40 r270; Top Overlay "1" at 3749.09,553.58 h40 r270; Top Overlay "MALE" at 4104.09,988.58 h60 r270
U1: Top Overlay "DIP-16" at 4180,2175 h59.05 r180